# EAGLE board m8-led-blink (EAGLE 5.11)
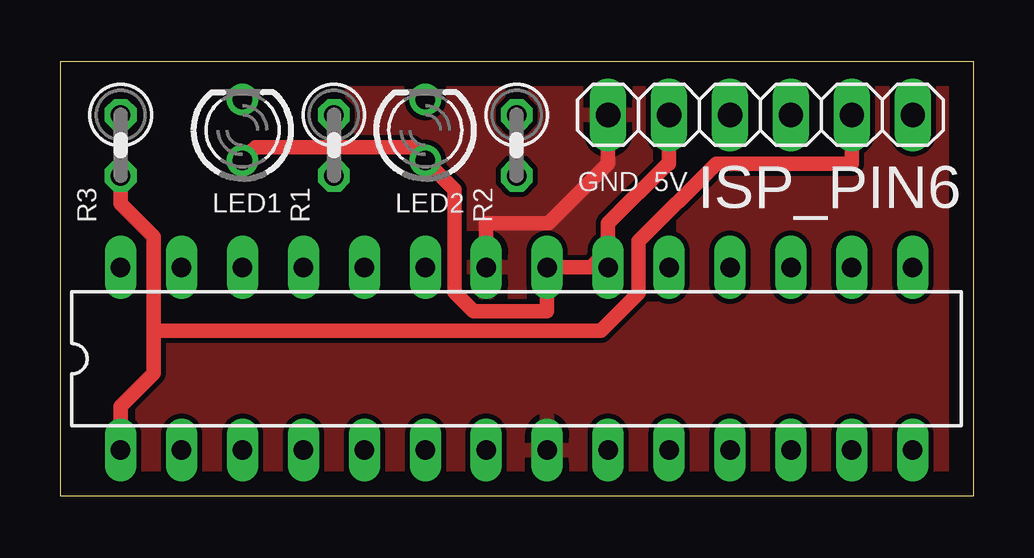
[diagram p0: board, top side]
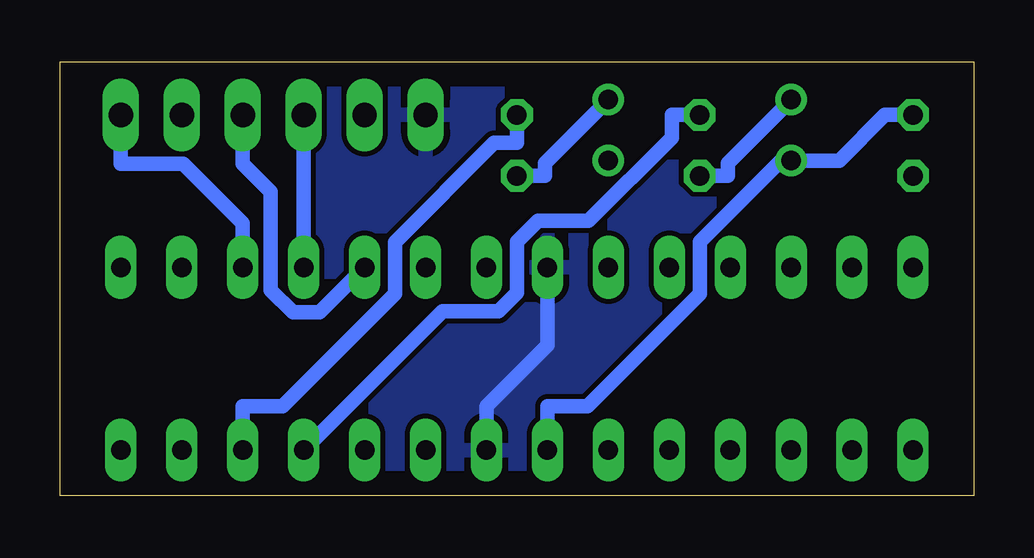
[diagram p1: board, bottom side, seen from below]

Size 38.09 x 18.09 mm. Coordinates in mm from the lower left corner, seen from the top.
Outline: 38.09,0 38.09,18.09 0,18.09 0,0 38.09,0
Copper layers (1*16): Top 0.035mm / dielectric 1.5mm / Bottom 0.035mm
Design rules "default": minimum track width 10mil, minimum drill 24mil, track to track 8mil, track to pad 8mil, pad to pad 8mil, via to via 8mil, smd to smd 8mil, copper to edge 40mil, drill to drill 8mil, minimum pad ring 10mil, minimum via ring 8mil, stop-mask expansion 4mil, vias tented up to drill 0mil, thermal gap 10mil
Net classes: 0 default: width 0.61 mm

## Footprints (pad centres in the part's own frame; a part is rotated, then mirrored left to right if it is on the bottom)
DIL28-3 = drill 0.813 long: 1 -16.51,-3.81; 2 -13.97,-3.81; 3 -11.43,-3.81; 4 -8.89,-3.81; 5 -6.35,-3.81; 6 -3.81,-3.81; 7 -1.27,-3.81; 8 1.27,-3.81; 9 3.81,-3.81; 10 6.35,-3.81; 11 8.89,-3.81; 12 11.43,-3.81; 13 13.97,-3.81; 14 16.51,-3.81; 15 16.51,3.81; 16 13.97,3.81; 17 11.43,3.81; 18 8.89,3.81; 19 6.35,3.81; 20 3.81,3.81; 21 1.27,3.81; 22 -1.27,3.81; 23 -3.81,3.81; 24 -6.35,3.81; 25 -8.89,3.81; 26 -11.43,3.81; 27 -13.97,3.81; 28 -16.51,3.81
1X06 = drill 1.016 long: 1 -6.35,0; 2 -3.81,0; 3 -1.27,0; 4 1.27,0; 5 3.81,0; 6 6.35,0
LED3MM = drill 0.813 round: A -1.27,0; K 1.27,0
0207/2V = drill 0.813 octagon: 1 -1.27,0; 2 1.27,0

## Placement (x,y rotation side)
IC1  MEGA8-P  [DIL28-3]  19.04,5.71 0 top
ISP_PIN6  [1X06]  29.2,15.88 0 top
LED1  [LED3MM]  7.61,15.24 90 top
LED2  [LED3MM]  15.23,15.24 90 top
R1  1k  [0207/2V]  11.42,14.61 270 top
R2  1k  [0207/2V]  19.04,14.61 270 top
R3  10k  [0207/2V]  2.53,14.61 270 top

## Library data of the parts
IC1 = atmel; OC_FARNELL: unknown; OC_NEWARK: unknown
ISP_PIN6 = pinhead
LED1 LED2 = SparkFun
R1-R3 = rcl

## Nets
5V: IC1.7 IC1.20 IC1.21 ISP_PIN6.2 LED1.A LED2.A R3.1
GND: IC1.8 IC1.22 ISP_PIN6.1
N$1: IC1.11 R1.1
N$2: IC1.12 R2.1
N$3: LED2.K R2.2
N$4: LED1.K R1.2
N$6: IC1.18 ISP_PIN6.3
N$7: IC1.19 ISP_PIN6.4
N$8: IC1.17 ISP_PIN6.6
N$9: IC1.1 ISP_PIN6.5 R3.2

## Tracks (layer width: path | path; a pad name or v marks a point on that pad's centre or on a via)
5V
  Top 0.61: 22.85,10.24 22.14,9.53 IC1.21 20.31,7.7 17.24,7.7 16.45,8.49 16.45,12.74 LED2.A 14.67,14.53 8.17,14.53 LED1.A | 22.85,10.24 22.85,11.35 25.34,13.84 25.39,13.84 ISP_PIN6.2 | 22.85,10.24 IC1.20
  Bottom 0.61: IC1.7 17.77,3.73 16.11,3.73 11.42,8.42 11.42,10.6 8.05,13.97 LED1.A 5.6,13.97 3.7,15.88 R3.1
GND
  Top 0.61: ISP_PIN6.1 22.85,13.84 20.36,11.35 17.77,11.35 IC1.22
  Bottom 0.61: IC1.8 20.31,3.73 17.77,6.27 IC1.22
  pour Top: 38.09,0 -0.01,0 -0.01,18.41 38.09,18.41
  pour Bottom: 38.09,0 -0.01,0 -0.01,18.41 38.09,18.41
N$1
  Bottom 0.61: R1.1 12.59,15.88 12.59,14.93 16.05,11.46 18.17,11.46 19.04,10.59 19.04,8.46 19.81,7.7 22.14,7.7 IC1.11
N$2
  Bottom 0.61: IC1.12 30.47,3.73 28.81,3.73 24.12,8.42 24.12,10.58 19.99,14.71 19.04,14.71 R2.1
N$3
  Bottom 0.61: R2.2 17.87,13.34 17.87,13.87 LED2.K
N$4
  Bottom 0.61: R1.2 10.25,13.34 10.25,13.87 LED1.K
N$6
  Bottom 0.61: IC1.18 ISP_PIN6.3
N$7
  Bottom 0.61: ISP_PIN6.4 30.47,13.84 29.3,12.67 29.3,8.57 28.38,7.64 27.27,7.64 IC1.19
N$8
  Bottom 0.61: IC1.17 30.47,11.35 32.96,13.84 35.55,13.84 ISP_PIN6.6
N$9
  Top 0.61: R3.2 2.53,12.17 3.9,10.79 3.9,6.88 | 3.9,6.88 3.9,5.11 2.53,3.73 IC1.1 | 3.9,6.88 22.55,6.88 24.12,8.45 24.12,10.6 27.36,13.84 33.01,13.84 ISP_PIN6.5

## Text on the board
tNames: GND | 5V